# Altium PCB Tuan_Hub.PcbDoc
Units mil, origin at the board's own origin, x right, y up, seen from the top; angles counter-clockwise.
Board outline 6000 x 4000 mil, 2 copper layers (Top Layer, Bottom Layer); 3 components, 3 nets, 28 pads, 4 vias.
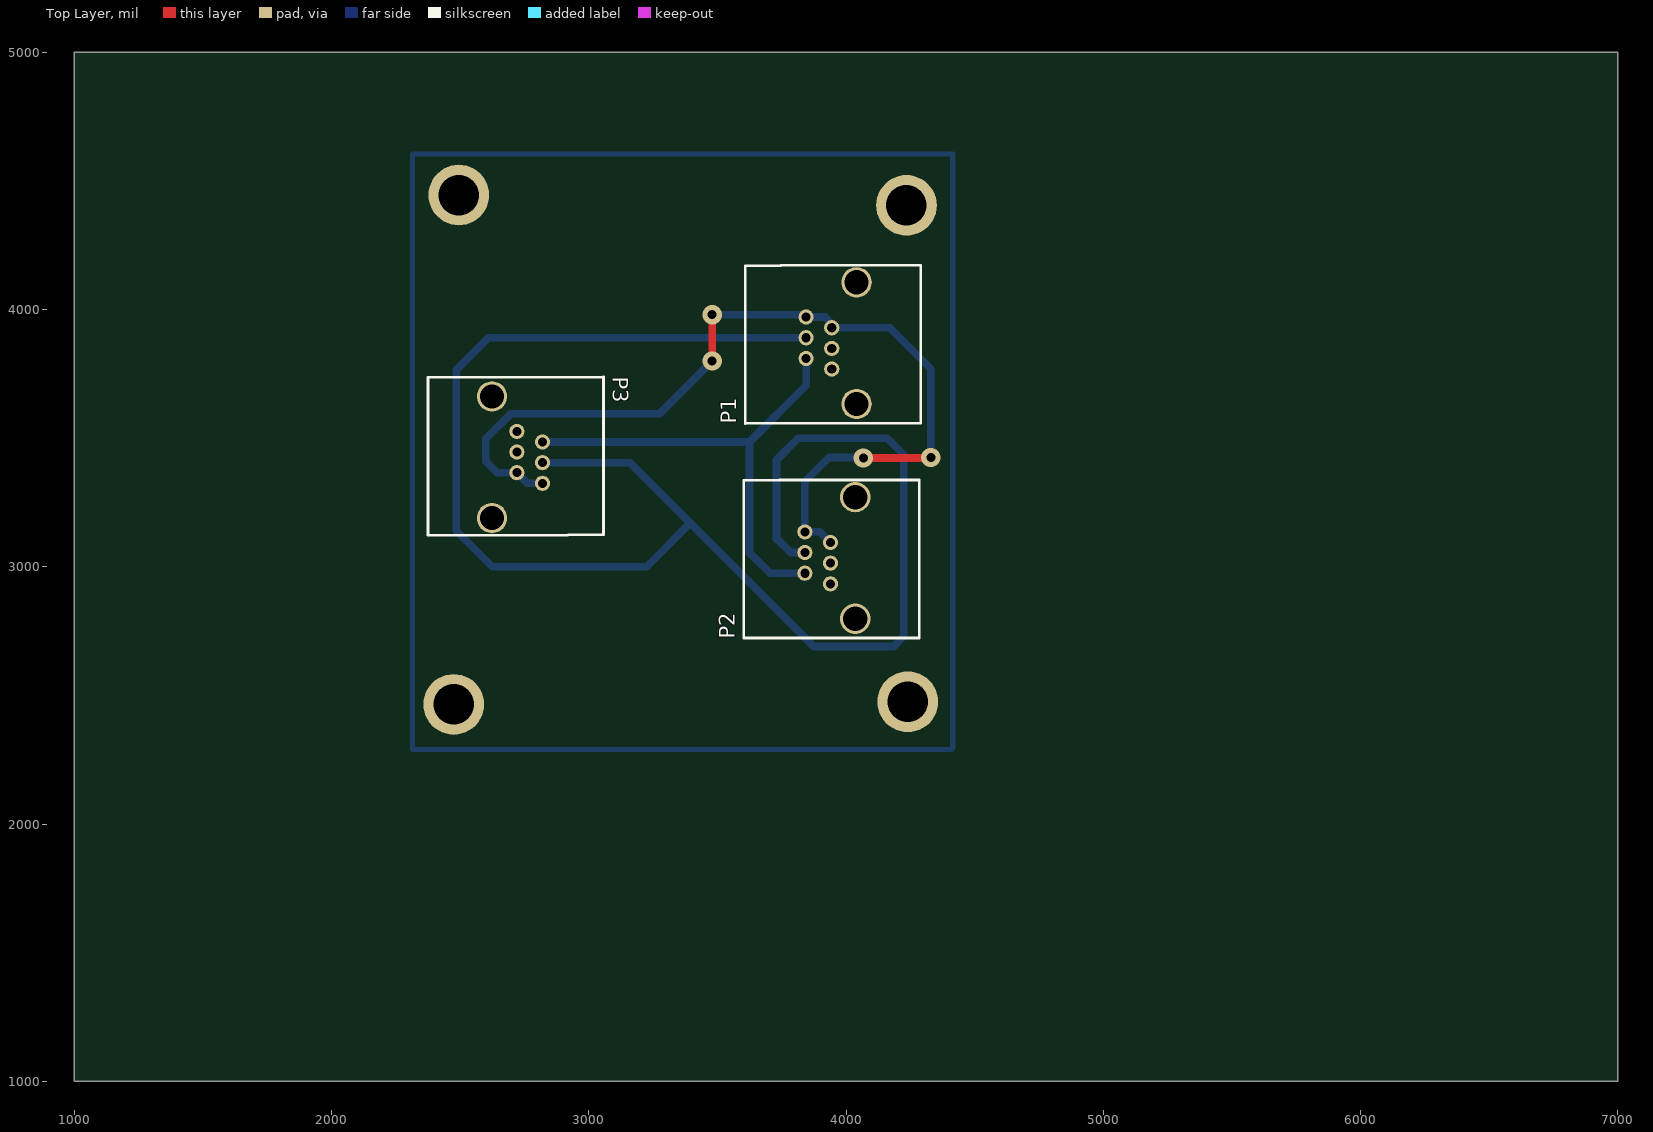
[diagram p0: Top Layer view]
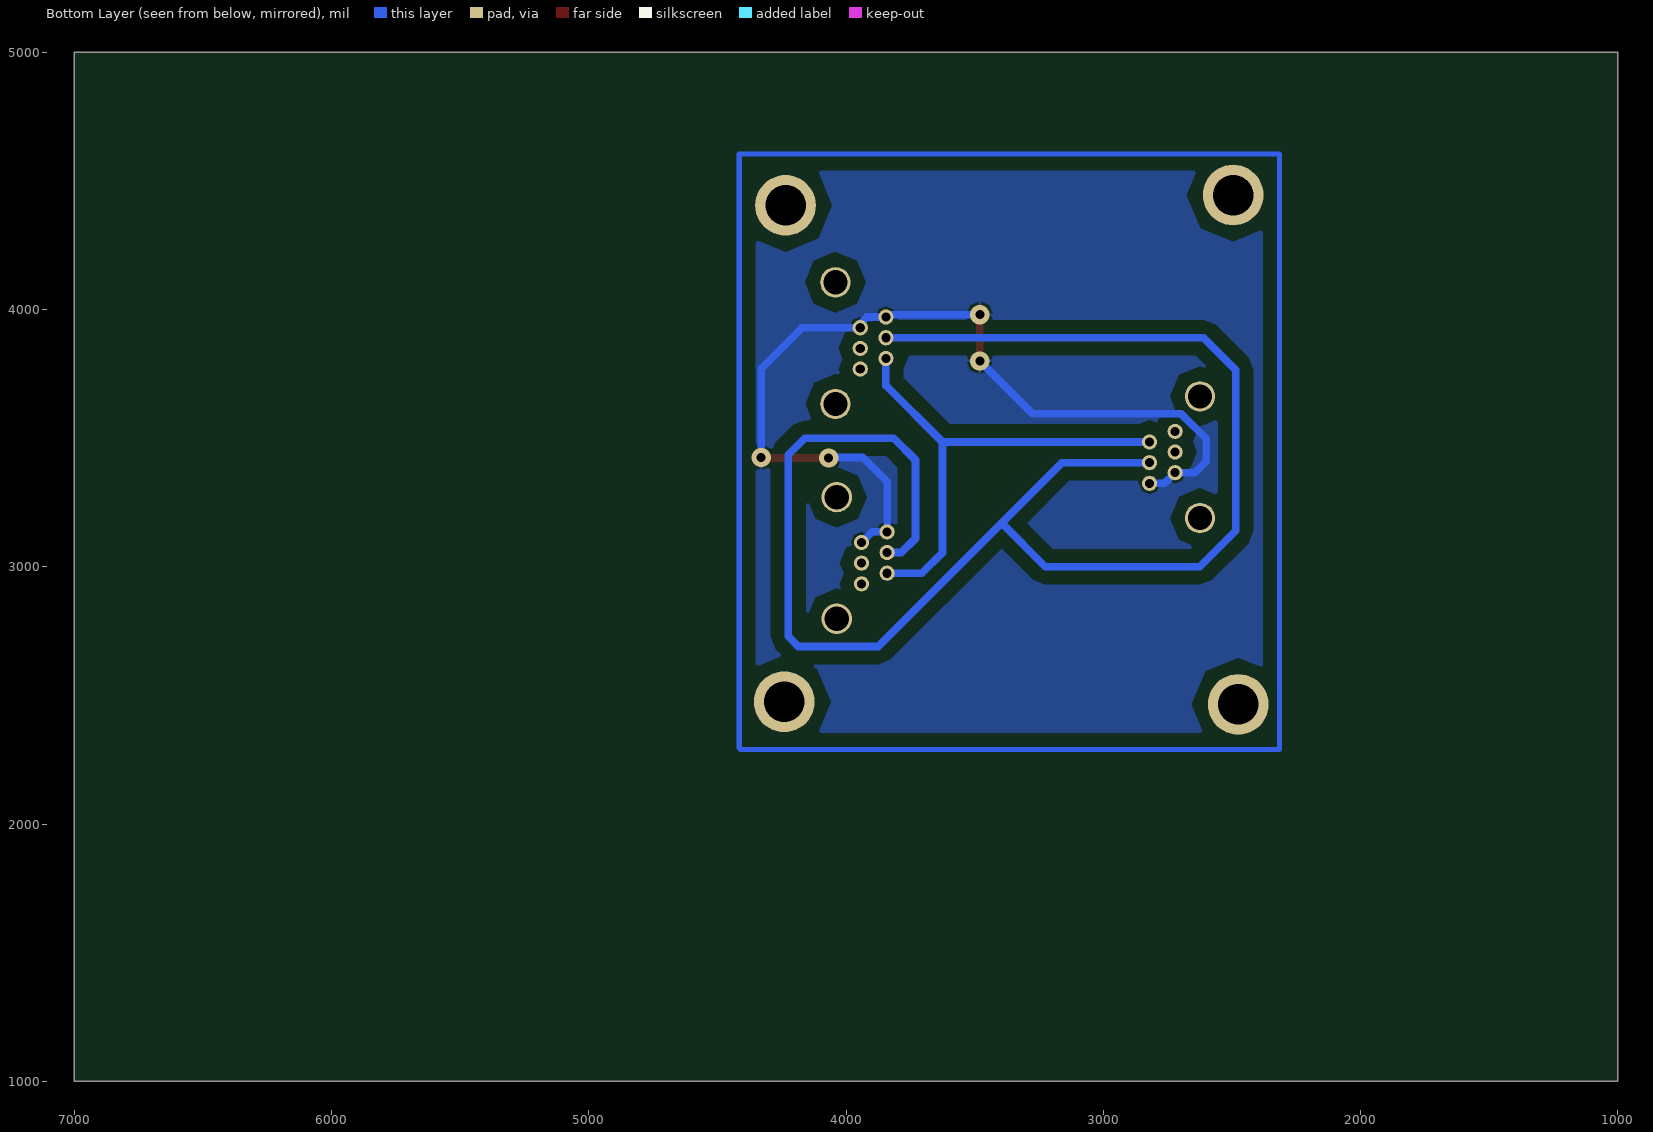
[diagram p1: Bottom Layer view, seen from below]
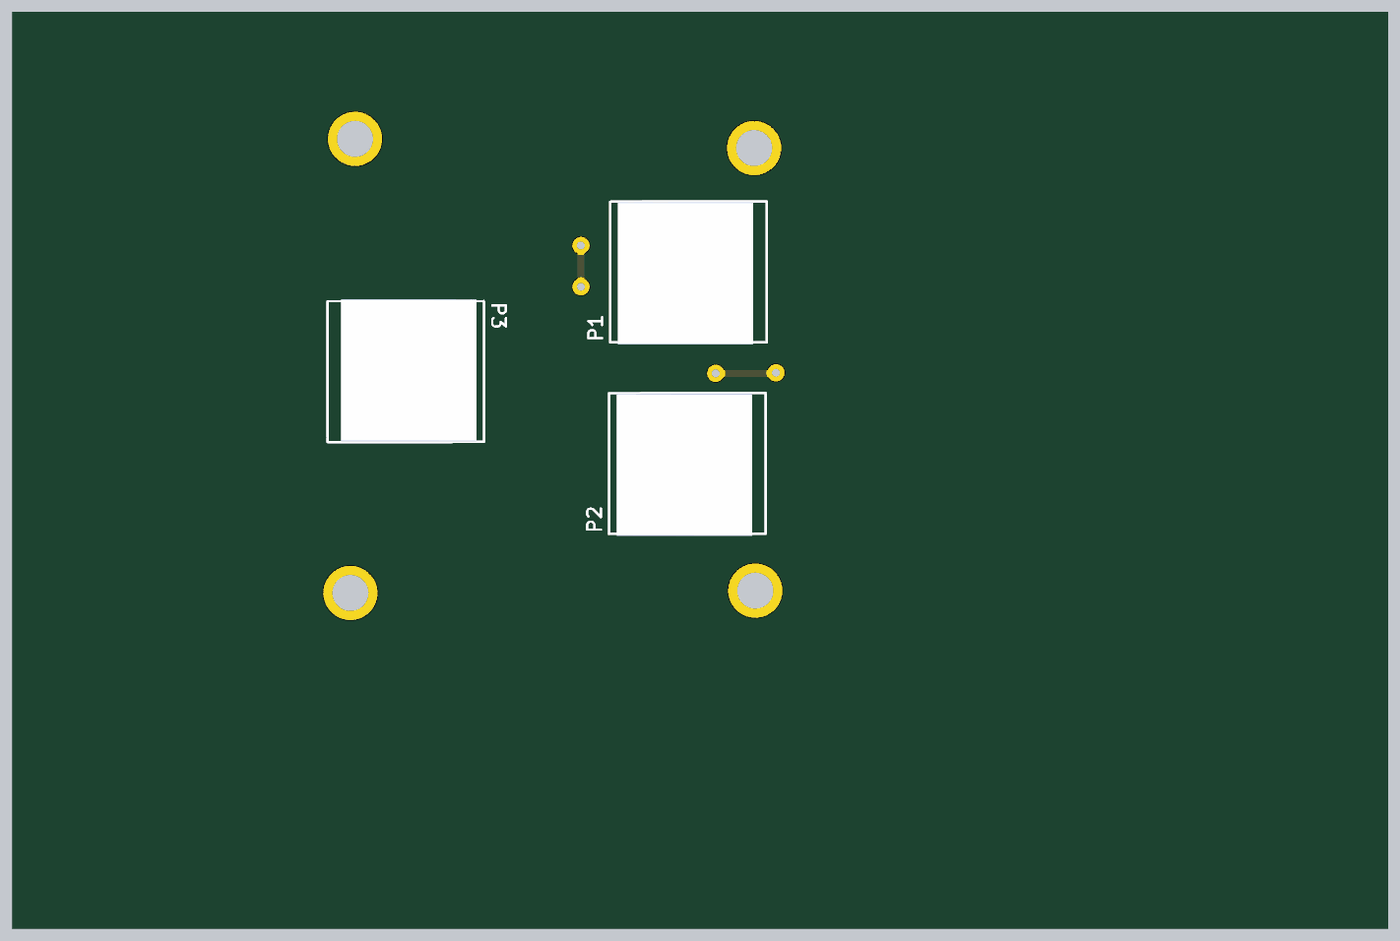
[diagram p2: 3D render of the assembled board from above, using the file's embedded part models]

## Layer stack, top to bottom
Top Solder: solder mask 0.4, Solder Resist, Dk 3.5
Top Layer: signal copper 1.4
Dielectric 1: dielectric 12.6, FR-4, Dk 4.8
Bottom Layer: signal copper 1.4
Bottom Solder: solder mask 0.4, Solder Resist, Dk 3.5

## Board outline
1000,1000 7000,1000 7000,5000 1000,5000

## Design rules (kind name [scope] priority, off if disabled: settings)
Clearance [All] p1: gap=50
PolygonConnect [All] p1: connectstyle=Relief reliefconductorwidth=10 reliefentries=4 polygonreliefangle="90 Angle" airgapwidth=10
RoutingVias [All] p1: holewidth=28 width=50 viastyle="Through Hole" minholewidth=28 minwidth=50 maxholewidth=28 maxwidth=50
SolderMaskExpansion [All] p1: expansion=4
Width [All] p1: maxlimit=80 minlimit=10 preferedwidth=20
30 further rules are at their usual default settings.

## Components (designator, comment, footprint, x,y, rotation, side; value= is the part's Value field where it differs from the comment)
P1 "Header 8" RJ11 3845,3810 r90 top
P2 "Header 8" RJ11 3840,2975 r90 top
P3 "Header 8" RJ11 2820,3485 r270 top

## Footprints (in the part's own frame and the unit in brackets; to place one, negate y for a bottom-side part, rotate by r counter-clockwise, add the part's x,y. Pads: shape width x height; smd on the part's side, far side on the other; paste and mask are expansions set on the pad)
RJ11 [mm] "DIP 20, 20 PIN, W 300mil, Pin to pin 100mil"
  round 1.5 hole 0.9: 1(0,0) 2(2.04,0) 3(4.08,0) 4(-1.05,-2.53) 5(0.99,-2.53) 6(3.03,-2.53)
  round 3 hole 2.4: 7(-4.5,-4.98) 8(7.51,-4.98)
  silkscreen extent -6.43,-11.3 9.2,6.03, body extent -6.71,-9.8 9.11,5.19, height 12.87

## Part data
P1 P2 P3: "Header, 8-Pin"

## Free pads (board coordinates)
  round 236.22 hole 157.48: 2(2475,2465) 2(2495,4445) 2(4235,4405) 2(4240,2475)

## Via types
v1: diameter 75, hole 35, Top Layer to Bottom Layer, 4 vias

## Nets (pads, with @x,y where several pads share a name; then routed paths per layer and width w, separated by ;. In a path a pad name is that pad's centre, name@x,y a point inside that pad or via, vN(x,y) a via of type N, cw(c..) or ccw(c..) an arc to the next point about the centre after c; other vN are vias at no path point)
A: P1.1 P2.1 P3.1 | length 1899.3
  Bottom Layer w30: P3.1 3625,3485 ; P2.1 3705,2975 3625,3055 3625,3485 ; P1.1 3845,3705 3625,3485
B: P1.2 P2.2 P3.2 | length 6492.7
  Bottom Layer w30: P3.2 3160.32,3404.68 3395,3170 ; P2.2 3784.68,3055.32 3730,3110 3730,3415 3815,3500 4160,3500 4225,3435 4225,2730 4185,2690 3875,2690 3395,3170 ; P1.2 2610.32,3890.32 2485,3765 2485,3140 2625,3000 3225,3000 3395,3170
GND: P1.3 P1.6 P2.3 P2.6 P3.3 P3.6 | length 3662
  Top Layer w30: v1(3480,3800) v1(3480,3980) ; v1(4067.5,3422.5) 4327.5,3422.5 v1(4330,3425)
  Bottom Layer w30: P3.3 2761.73,3324.37 P3.6 2644.29,3365.71 2600,3410 2600,3497.2 2697.8,3595 3275,3595 v1(3480,3800) ; v1(3480,3980) 3835.63,3980 P1.3 3919.37,3970.63 3944.61,3945.39 P1.6 4170.71,3929.29 4330,3770 v1(4330,3425) ; P2.6 3898.27,3135.63 P2.3 3840,3330 3935,3425 4065,3425 v1(4067.5,3422.5)
pads on no net: P1.4 P1.5 P1.7 P1.8 P2.4 P2.5 P2.7 P2.8 P3.4 P3.5 P3.7 P3.8
copper on no net: | length 8837.1
  Bottom Layer w20: 2315,2590 2315,4250 2315,4605 4415,4605 4415,4250 4415,2590 4415,2295 4410,2290 2315,2290 2315,2600

## Polygon pours and split planes (outlines as drawn)
GND on Bottom Layer "G2" (solid, remove dead copper, pour order 0): 2355,4560 2345,4550 2345,2350 4375,2350 4380,2345 4375,2350 4375,4560